# Altium PCB PCB1.PcbDoc
Units mil, origin at the board's own origin, x right, y up, seen from the top; angles counter-clockwise.
Board outline 2637.8 x 1850.39 mil, 2 copper layers (Top Layer, Bottom Layer); 74 components, 46 nets, 275 pads, 204 vias.
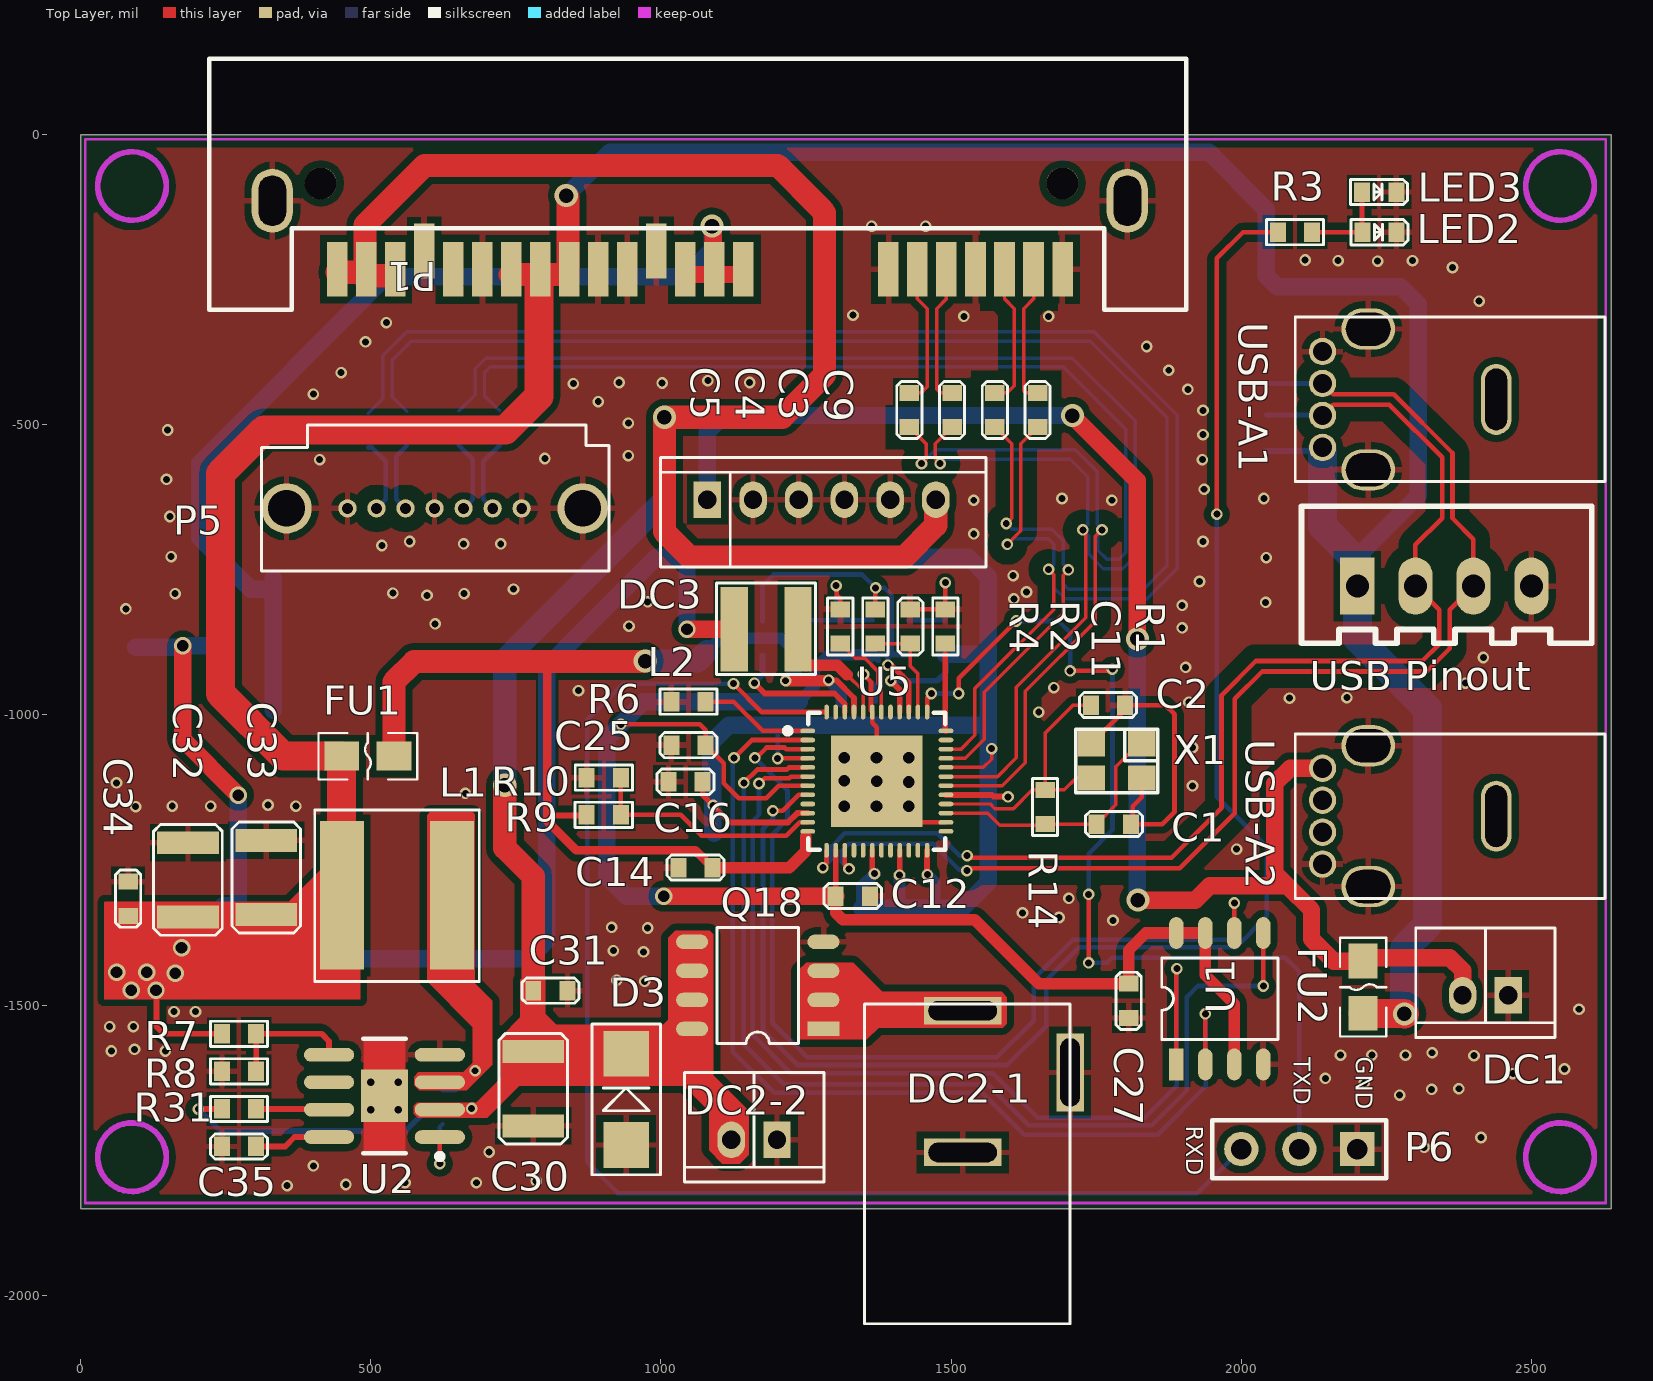
[diagram p0: Top Layer view]
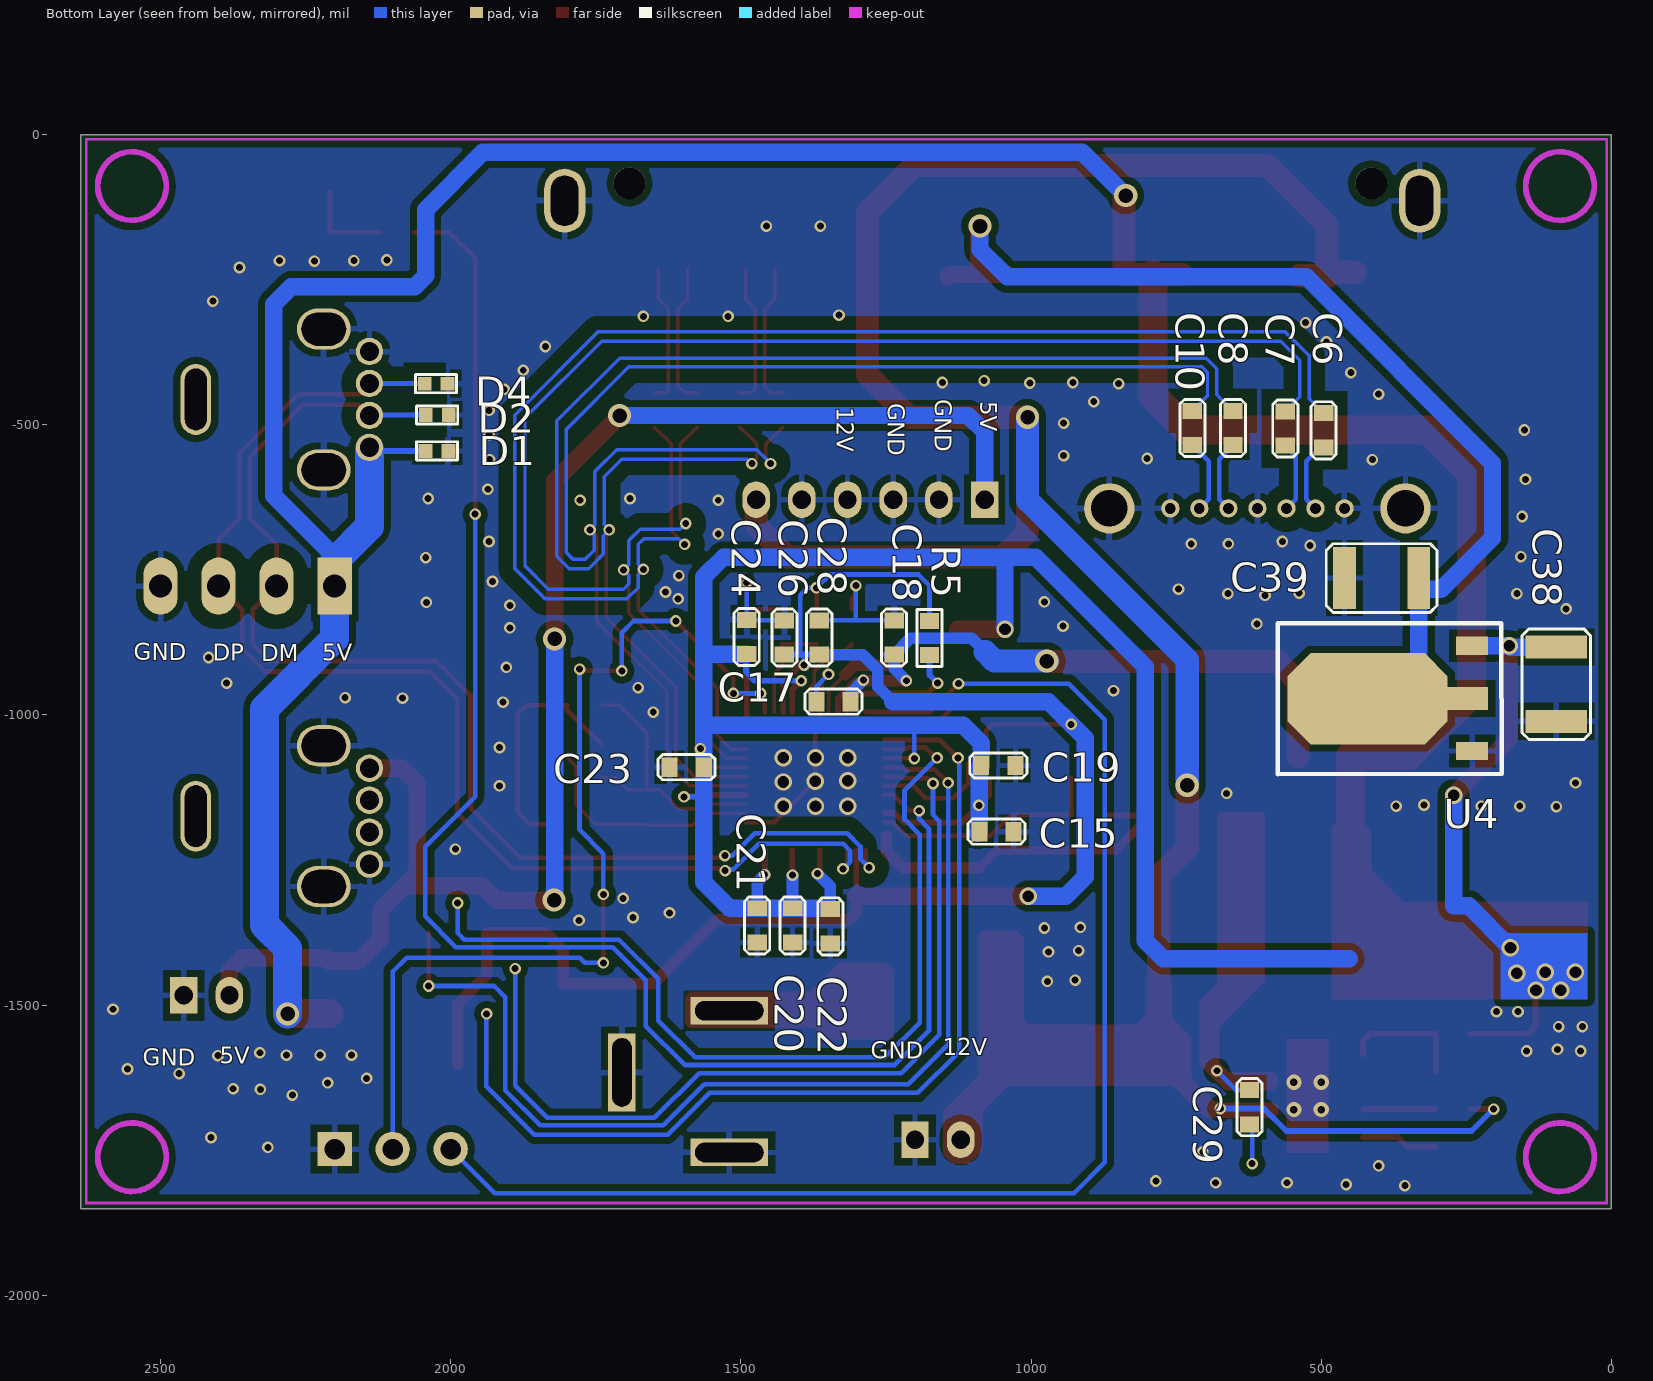
[diagram p1: Bottom Layer view, seen from below]

## Layer stack, top to bottom
Top Layer: signal copper 1.4
Dielectric: dielectric 12.6, FR-4, Dk 4.8
Bottom Layer: signal copper 1.4

## Board outline
0,-1850.39 2637.8,-1850.39 2637.8,0 0,0

## Design rules (kind name [scope] priority, off if disabled: settings)
Clearance hspeed [InNetClass('hspeed')] p1: gap=10
Clearance gnd [InPolygon] p2: gap=12
Clearance [All] p3: gap=5
DiffPairsRouting [All] p1: maxlimit=10 minlimit=10 mostfreqgap=10 maxuncoupledlength=500
MinimumSolderMaskSliver [All] p1: minsoldermaskwidth=1
PolygonConnect PolygonConnect_1 [IsVia] p1: connectstyle=Direct reliefconductorwidth=10 reliefentries=4 polygonreliefangle="90 Angle"
PolygonConnect [All] p2: connectstyle=Relief reliefconductorwidth=10 reliefentries=4 polygonreliefangle="90 Angle"
RoutingVias [All] p1: holewidth=28 width=50 viastyle="Through Hole" minholewidth=28 minwidth=50 maxholewidth=28 maxwidth=50
SilkToSilkClearance [All] p1: silktosilkclearance=1
SilkscreenOverComponentPads [All] p1: minsilkscreentomaskgap=1
SolderMaskExpansion [All] p1: expansion=4
Width [All] p1: maxlimit=300 minlimit=6 preferedwidth=10
24 further rules are at their usual default settings.

## Classes and differential pairs
component class CONNECTOR: C3 C4 C5 C6 C7 C8 C9 C10 D1 D2 D4 DC1 DC2-1 DC2-2 DC3 P1 P5 "USB Pinout" USB-A1 USB-A2
component class CPU: C1 C2 C11 C12 C14 C15 C16 C17 C18 C19 C20 C21 C22 C23 C24 C25 C26 C27 C28 L2 LED2 LED3 P6 R1 R2 R3 R4 R5 R6 R9 R10 R14 U1 U5 X1
component class power: C29 C30 C31 C32 C33 C34 C35 C38 C39 D3 FU1 FU2 L1 Q18 R7 R8 R31 U2 U4
net class hspeed: D_N D_P RX_N RX_P TX1_N TX1_P TX2_N TX2_P TX_N TX_P
differential pair RX: +RX_P -RX_N
differential pair TX: +TX_P -TX_N
differential pair D: +D_P -D_N
differential pair RX1: +RX1_P -RX1_N
differential pair RX2: +RX2_P -RX2_N
differential pair TX1: +TX1_P -TX1_N
differential pair TX2: +TX2_P -TX2_N

## Components (designator, comment, footprint, x,y, rotation, side; value= is the part's Value field where it differs from the comment)
C1 "20pF" 0603c 1810,-1188 r180 top
C2 "20pF" 0603C 1800,-983 r180 top
C3 "0.1uF/25V" 0603C 1575.33,-504 r90 top
C4 "0.1uF/25V" 0603C 1501.67,-504 r90 top
C5 "0.1uF/25V" 0603C 1428,-504 r90 top
C6 "0.1uF/25V" 0603C 496,-480 r270 bottom
C7 "0.1uF/25V" 0603C 562,-476.95 r270 bottom
C8 "0.1uF/25V" 0603C 652,-475.95 r270 bottom
C9 "0.1uF/25V" 0603C 1649,-504 r90 top
C10 "0.1uF/25V" 0603C 722,-475.95 r270 bottom
C11 "0.1uF/25V" 0603C 1429.67,-877 r90 top
C12 "0.1uF/25V" 0603C 1301,-1312 r0 top
C14 "0.1uF/25V" 0603C 1089,-1263 r180 top
C15 "10uF/25V" 0603C 1089,-1201 r180 bottom
C16 "0.1uF/25V" 0603C 1072,-1115 r180 top
C17 "10uF/25V" 0603C 1311,-977 r0 bottom
C18 "0.1uF/25V" 0603C 1236,-896 r90 bottom
C19 "0.1uF/25V" 0603C 1086,-1087 r180 bottom
C20 "0.1uF/25V" 0603C 1411,-1333 r270 bottom
C21 "0.1uF/25V" 0603C 1472,-1333 r270 bottom
C22 "0.1uF/25V" 0603C 1346,-1334.65 r270 bottom
C23 "0.1uF/25V" 0603C 1564,-1090 r0 bottom
C24 "0.1uF/25V" 0603C 1490,-895 r90 bottom
C25 "0.1uF/25V" 0603C 1077,-1052 r180 top
C26 "0.1uF/25V" 0603C 1425,-896 r90 bottom
C27 "0.1uF/25V" 0603C 1806,-1463 r270 top
C28 "0.1uF/25V" 0603C 1365,-896 r90 bottom
C29 "0.1uF/25V" 0603C 623.62,-1705.38 r90 bottom
C30 "100uF/25V" 1210C 780,-1580 r270 top
C31 "0.1uF/25V" 0603C 780,-1475 r0 top
C32 "100uF/25V" 1210C 185,-1348 r90 top
C33 "100uF/25V" 1210C 320,-1344 r90 top
C34 "0.1uF/25V" 0603C 82,-1346 r90 top
C35 "0.1uF/25V" 0603C 302.68,-1743.38 r180 top
C38 "22uF/25V" 1210C 95,-883 r270 bottom
C39 "22uF/25V" 1210C 332,-764 r0 bottom
D1 "PESD5V0S1UL" 0402R 2004,-545 r0 bottom
D2 "PESD5V0S1UL" 0402R 2003.56,-483.01 r0 bottom
D3 "SMAJ12CA" SMA 940,-1741 r90 top
D4 "PESD5V0S1UL" 0402R 2005.56,-429 r0 bottom
DC1 "DC1" 2X2MMZ 2460,-1483 r180 top
DC2-1 "DC2-1" DC005 1520,-2049 r90 top locked
DC2-2 "DC2-2" 2X2MMZ 1200,-1732 r180 top
DC3 "DC3" 2X6MMZ 1080,-629 r0 top
FU1 "SMD0805P100TF" F0805 450,-1071 r0 top
FU2 "SL0805300" F0805 2210,-1514 r90 top
L1 "XAL7030-103MEC" XAL7030 640,-1311 r180 top
L2 "NRS4012T4R7MDGJ" NRS4012T4R7MDGJ 1126,-852 r0 top
LED2 "" 0603LED 2208.55,-168.22 r0 top
LED3 "" 0603LED 2208,-99 r0 top
P1 "SATA7+15P" "SATA 7+15PML" 442,-232 r180 top locked
P5 "Header 9" "SATA 7P" 460,-644 r0 top
P6 "Header 3" HDR1X3 2200,-1748 r180 top
Q18 "DTM4435" SO-8 1280,-1541 r180 top
R1 "12K/1%" 0603R 1490,-877 r90 top
R2 "510K" 0603R 1369.33,-877 r90 top
R3 "330" 0603R 2063,-168 r0 top
R4 "100K" 0603R 1309,-877 r90 top
R5 "100K" 0603R 1175,-897 r90 bottom
R6 "100K" 0603R 1077,-977 r180 top
R7 "44.2K/1%" 0603R 243.62,-1549.38 r0 top
R8 "10K/1%" 0603R 302.68,-1614.04 r180 top
R9 "100K" 0603R 931,-1172 r180 top
R10 "150K" 0603R 872,-1108 r0 top
R14 "1MR" 0603R 1662,-1129 r270 top
R31 "100k" 0603R 302.68,-1678.71 r180 top
U1 "MX25L1006E" SO-8 1888,-1602 r90 top
U2 "FR9888SPG" SOP120P600-8N 523.62,-1656.38 r180 top
U4 "LD1117-3.3" sot223 240,-1062 r90 bottom
U5 "JMS578" QFN400P600-8N 1372,-1114 r0 top locked
"USB Pinout" "USB Pinout" sip-4l 2200,-778 r0 top
USB-A1 "Header 6" USB-A-C 2140,-539 r90 top
USB-A2 "Header 6" USB-A-C 2140,-1257 r90 top
X1 "30MHz/20P" XTAL4TN_3225 1785,-1079 r180 top

## Footprints (in the part's own frame and the unit in brackets; to place one, negate y for a bottom-side part, rotate by r counter-clockwise, add the part's x,y. Pads: shape width x height; smd on the part's side, far side on the other; paste and mask are expansions set on the pad)
2X2MMZ [mm]
  rect 1.2x1.6 hole 0.8: 1(0,0)
  oval 1.2x1.6 hole 0.8: 2(2,0)
  silkscreen extent -2.05,-2.95 4.05,1.85
2X6MMZ [mm]
  rect 1.2x1.6 hole 0.8: 1(0,0)
  oval 1.2x1.6 hole 0.8: 2(2,0) 3(4,0) 4(6,0) 5(8,0) 6(10,0)
  silkscreen extent -2.05,-2.95 12.19,1.85
0402R [mm]
  rect 0.6x0.6 smd: 1(0,0) 2(1,0)
  silkscreen extent -0.4,-0.4 1.4,0.4
0603c [mm]
  rect 0.7x0.85 smd: 1(0,0) 2(1.5,0)
  silkscreen extent -0.5,-0.55 2,0.55
0603C [mm]
  rect 0.7x0.85 smd: 1(0,0) 2(1.5,0)
  silkscreen extent -0.5,-0.55 2,0.55
0603LED [mm]
  rect 0.7x0.85 smd: 1(0,0) 2(1.5,0)
  silkscreen extent -0.5,-0.55 2,0.55
0603R [mm]
  rect 0.7x0.85 smd: 1(0,0) 2(1.5,0)
  silkscreen extent -0.5,-0.55 2,0.55
1210C [mm]
  rect 1x2.7 smd: 1(0,0) 2(3.25,0)
  silkscreen extent -0.8,-1.5 4.05,1.5
DC005 [mm]
  rect 3.4x1.2 hole 0.85 slot 3 at 0 deg: 2(11,-4.7)
  rect 1.2x3.4 hole 0.85 slot 3 at 90 deg: 3(7.5,0) 4(13.7,0)
  silkscreen extent 0,-4.7 14,4.3
F0805 [mil]
  rect 60x50 smd: 1(0,0) 2(90,0)
  silkscreen extent -40,-40 130,40, body extent 4,-23 82,24, height 20
HDR1X3 [mm] "Connector; Header; 3 Position"
  rect 1.5x1.5 hole 0.9: 1(0,0)
  round 1.5 hole 0.9: 2(2.54,0) 3(5.08,0)
  silkscreen extent -1.27,-1.27 6.35,1.27
NRS4012T4R7MDGJ [mm]
  rect 1.2x3.7 smd: 1(0,0) 2(2.8,0)
  silkscreen extent -0.76,-1.98 3.56,2.02
QFN400P600-8N [mm]
  oval 0.65x0.2 smd: 1(-3.025,2.2) 2(-3.025,1.8) 3(-3.025,1.4) 4(-3.025,1) 5(-3.025,0.6) 6(-3.025,0.2) 7(-3.025,-0.2) 8(-3.025,-0.6) 9(-3.025,-1) 10(-3.025,-1.4) 11(-3.025,-1.8) 12(-3.025,-2.2) 25(3.025,-2.2) 26(3.025,-1.8) 27(3.025,-1.4) 28(3.025,-1) 29(3.025,-0.6) 30(3.025,-0.2) 31(3.025,0.2) 32(3.025,0.6) 33(3.025,1) 34(3.025,1.4) 35(3.025,1.8) 36(3.025,2.2)
  oval 0.2x0.65 smd: 13(-2.2,-3.025) 14(-1.8,-3.025) 15(-1.4,-3.025) 16(-1,-3.025) 17(-0.6,-3.025) 18(-0.2,-3.025) 19(0.2,-3.025) 20(0.6,-3.025) 21(1,-3.025) 22(1.4,-3.025) 23(1.8,-3.025) 24(2.2,-3.025) 37(2.2,3.025) 38(1.8,3.025) 39(1.4,3.025) 40(1,3.025) 41(0.6,3.025) 42(0.2,3.025) 43(-0.2,3.025) 44(-0.6,3.025) 45(-1,3.025) 46(-1.4,3.025) 47(-1.8,3.025) 48(-2.2,3.025)
  rect 0x0 smd: 49(-0.85,0) 50(-0.35,0) 51(0,0.85) 52(0,0.35) 53(0.85,0) 54(0.35,0) 55(0,-0.85) 56(0,-0.35)
  rect 4x4 smd: 49(0,0)
  silkscreen extent -4.02,-3 3,3
"SATA 7+15PML" [mm]
  rect 0.9x2.4 smd: 1(-31.75,0) 2(-30.48,0) 3(-29.21,0) 4(-27.94,0) 5(-26.67,0) 6(-25.4,0) 7(-24.13,0) 8(-17.78,0) 9(-16.51,0) 10(-15.24,0) 11(-13.97,-0.8) 12(-12.7,0) 13(-11.43,0) 14(-10.16,0) 15(-8.89,0) 16(-7.62,0) 17(-6.35,0) 18(-5.08,0) 19(-3.81,-0.8) 20(-2.54,0) 21(-1.27,0) 22(0,0)
  round 1.4 hole 1.4 unplated: 23(-31.75,-3.76) 24(0.72,-3.76)
  oval 1.8x2.8 hole 1.2 slot 2.2 at 90 deg: 25(-34.585,-3) 26(2.835,-3)
  silkscreen extent -37.16,-9.22 5.59,1.78
"SATA 7P" [mm]
  round 0.8 hole 0.47: 1(0,0) 2(1.27,0) 3(2.54,0) 4(3.81,0) 5(5.08,0) 6(6.35,0) 7(7.62,0)
  round 2.2 hole 1.6: 8(10.29,0) 9(-2.67,0)
  silkscreen extent -3.76,-2.74 11.44,3.66
sip-4l [mm]
  rect 1.5x2.5 hole 1: 1(0,0)
  oval 1.5x2.5 hole 1: 2(2.54,0) 3(5.08,0) 4(7.62,0)
  silkscreen extent -2.44,-2.5 10.26,3.5
SMA [mm]
  rect 2x2 smd: 1(0,0) 2(4,0)
  silkscreen extent -1.3,-1.5 5.3,1.5
SO-8 [mil]
  rect 55x25 smd: 1(0,0)
  oval 55x25 smd: 2(0,-50) 3(0,-100) 4(0,-150) 5(226.38,-150) 6(226.38,-100) 7(226.38,-50) 8(226.38,0)
  silkscreen extent 43,-175 183,25
SOP120P600-8N [mm]
  oval 2.2x0.6 smd: 1(-2.425,1.8) 2(-2.425,0.6) 3(-2.425,-0.6) 4(-2.425,-1.8) 5(2.425,-1.8) 6(2.425,-0.6) 7(2.425,0.6) 8(2.425,1.8)
  rect 2.05x2.3 smd: 9(0,0)
  silkscreen extent -2.55,-2.5 0.93,2.77
sot223 [mm]
  rect 0.8x1.4 smd: 1(0,0) 3(4.6,0)
  rect 1x1.854 smd: 2(2.3,0.227)
  oct 4x7 smd: 4(2.286,4.572)
  silkscreen extent -1.02,-1.3 5.59,8.51
USB-A-C [mm]
  round 1.2 hole 0.85: 1(4.2,0) 2(2.8,0) 3(1.4,0) 4(0,0)
  oval 1.8x2.35 hole 1.45 slot 1.95 at 90 deg: 5(-0.98,-2) 6(5.18,-2)
  oval 3.1x1.35 hole 0.95 slot 2.7 at 0 deg: 7(2.1,-7.6)
  silkscreen extent -1.5,-12.36 5.7,1.19
XAL7030 [mm]
  rect 1.92x6.5 smd: 1(0,0) 2(4.82,0)
  silkscreen extent -1.19,-3.74 6.01,3.76
XTAL4TN_3225 [mm]
  rect 1.2x1.1 smd: 1(-1.1,-0.75) 2(1.1,-0.75) 3(1.1,0.75) 4(-1.1,0.75)
  silkscreen extent -1.8,-1.38 1.79,1.4

## Part data
C1 C2: library part CAP, "Capacitor"
C3 C4 C5 C6 C7 C8 C9 C10 C11 C12 C14 C15 C16 C17 C18 C19 C20 C21 C22 C23 C24 C25 C26 C27 C28 C29 C30 C31 C32 C33 C34 C35 C38 C39: library part 0.01UF, "CCX85-103"
D1 D2 D4: library part "D Zener", "Zener Diode"
D3: library part "DIODE S", "Schottky Diode"
DC1 DC2-2: library part "Header 2", "Header, 2-Pin"
DC2-1 "USB Pinout": library part "Header 4", "Header, 4-Pin"
DC3: library part "Header 6", "Header, 6-Pin"
FU1 FU2: library part FUSE2, "Fuse"
L1 L2: library part INDUCTOR
LED2 LED3: library part LED
P1: "Conn SATA PL 15Power/7Signal POS 1.27mm Solder RA Thru-Hole 22 Terminal 1 Port"
P5: "Header, 9-Pin"
P6: "Header, 3-Pin"
Q18: library part Si4004DY, "Si4004DY"
R1 R2 R4 R5 R6 R7 R8 R14 R31: library part Res3, "Resistor"
R3 R9 R10: library part R, "R"
U1: library part M25P40-VMN6
U4: library part LD1117-1.2
USB-A1 USB-A2: "Header, 6-Pin"
X1: library part CRYSTAL_2

## Via types
v1: diameter 20, hole 12, Top Layer to Bottom Layer, tented both sides, 172 vias
v2: diameter 30, hole 20, Top Layer to Bottom Layer, tented both sides, 19 vias
v3: diameter 40, hole 25, Top Layer to Bottom Layer, tented both sides, 9 vias
v4: diameter 25.98, hole 12.99, Top Layer to Bottom Layer, tented top, 4 vias

## Nets (pads, with @x,y where several pads share a name; then routed paths per layer and width w, separated by ;. In a path a pad name is that pad's centre, name@x,y a point inside that pad or via, vN(x,y) a via of type N, cw(c..) or ccw(c..) an arc to the next point about the centre after c; other vN are vias at no path point)
CS: U1.1 U5.6 | length 1710.8
  Top Layer w8: v1@1169.5,-1118.5 1179,-1109 1221,-1109 1223.87,-1106.13 U5.6 ; U1.1 v1@1888,-1438
  Bottom Layer w8: v1(1169,-1118) 1169,-1172 1158,-1183 1158,-1551 1224,-1617 1572,-1617 1649,-1694 1834,-1694 1889,-1639 v1(1889,-1437) v1@1885,-1433
D_N: "USB Pinout.2" D2.2 U5.13 USB-A1.3 | length 2121.2
  Top Layer w8: v1(1279,-1263) 1285.39,-1256.61 U5.13 ; v1(1527.73,-1242.27) 1531.73,-1246.27 1879.73,-1246.27 1966,-1160 1966,-966 2025,-907 2312,-907 2341,-878 2341,-819 2300,-778 2300,-707 2346,-661 2346,-556 2257,-467 ; USB-A1.3 2158.56,-465.32 2255.32,-465.32 2256.16,-466.16
  Bottom Layer w8: v1(1279,-1263) 1294,-1248 1294,-1226.54 1316.54,-1204 1476.46,-1204 1514.73,-1242.27 v1(1527.73,-1242.27) v1@1528,-1242 ; D2.2 2139.13,-483.01 USB-A1.3
D_P: "USB Pinout.3" D4.2 U5.15 USB-A1.2 | length 2219.4
  Top Layer w8: U5.15 1316.88,-1257.88 v1(1324,-1265) ; v1(1527,-1268.27) 1531,-1264.27 1893.73,-1264.27 1989,-1169 1989,-972 2036,-925 2319.46,-925 2359,-885.46 2359,-819 2400,-778 ; USB-A1.2 2158.56,-447.32 2241,-447.32 ; 2256.16,-447.32 2241,-447.32 ; 2400,-727 2400,-778 ; 2241,-447.32 2262.78,-447.32 2364,-548.54 2364,-661 2400,-697 2400,-778
  Bottom Layer w8: v1(1324,-1265) 1323,-1265 1312,-1254 1312,-1234 1324,-1222 1469,-1222 1513.27,-1266.27 v1@1527,-1266.27 ; D4.2 2045.16,-428.76 USB-A1.2
GND: "USB Pinout.4" C1.1 C2.1 C11.2 C12.2 C14.2 C15.2 C16.2 C17.2 C18.2 C19.2 C20.2 C21.2 C22.2 C23.2 C24.2 C25.2 C26.2 C27.2 C28.2 C30.2 C31.2 C32.2 C33.2 C34.2 C35.2 C38.2 C39.2 D1.1 D2.1 D3.1 D4.1 DC1.1 DC2-1.2 DC2-1.3 DC2-2.1 DC3.2 DC3.3 DC3.4 DC3.5 LED2.2 LED3.2 P1.1 P1.4 P1.7 P1.11 P1.12 P1.13 P1.17 P1.19 P1.25 P1.26 P5.1 P5.4 P5.7 P5.8 P5.9 P6.1 Q18.4 R1.2 R4.2 R6.2 R8.2 R10.1 U1.4 U2.4 U2.9 U4.1 U5.26 U5.43 U5.49 USB-A1.1 USB-A1.5 USB-A1.6 USB-A2.4 USB-A2.5 USB-A2.6 X1.2 X1.4 | length 1387.1
  Top Layer w8: v1(1302,-777) 1303,-778 1303,-794 1309,-800 R4.2 ; v1(1349,-930) 1362,-943 1362,-992.78 U5.43 1364.13,-1013.13 1372,-1021 v2(1372,-1114) 1442.87,-1184.87 U5.26 ; C11.2 R1.2 v1(1490,-772) ; X1.2 1800,-991.17 C2.1 1869,-983 1885,-999 1885,-1167 1864,-1188 C1.1 1813,-1185 1813,-1157 1828.31,-1141.69 X1.4
  Bottom Layer w8: C18.2 1302,-836.94 ; v1(1302,-777) 1302,-836.94 ; v1(1349,-930) 1370.06,-951.06 C17.2 ; C28.2 1302,-836.94 ; C26.2 1489,-836.94 C24.2 v1(1490,-772)
  other v1: 356,-1811 457,-1809 559,-1806 682,-1806 785,-1803 401,-1777 704,-1753 2315,-1745 2413,-1728 2273,-1655 2328,-1645 2375,-1644 2212,-1634 2145,-1626 2468,-1618 2557,-1610 2401,-1587 2171,-1586 2225,-1586 2283,-1586 2329,-1582 53,-1579 146,-1579 93,-1576 50,-1537 91,-1537 161,-1511 198,-1511 2582,-1507 972,-1459 924,-1457 970,-1408 918,-1406 977,-1367 915,-1366 1779,-1354 1686,-1349 1623,-1341 1703,-1316 1992,-1231 95,-1158 158,-1157 224,-1157 371,-1157 323,-1155 663,-1135 1916,-1122 62,-1117 1916,-1056 1651,-995 1910,-978 2083,-971 2182,-970 858,-958 1677,-953 2386,-945 1904,-918 2417,-901 1898,-850 945,-847 611,-843 78,-817 1898,-811 2042,-806 977,-805 1608,-800 597,-794 163,-791 661,-791 538,-790 1630,-788 746,-783 1928,-770 1607,-760 2043,-729 156,-727 519,-708 660,-705 724,-705 567,-701 1934,-701 1539,-688 154,-658 1539,-630 1777,-630 1691,-627 2039,-627 1936,-611 148,-594 412,-560 1933,-560 800,-558 944,-553 1934,-517 150,-509 944,-497 1934,-475 892,-460 401,-447 1908,-439 849,-429 1002,-428 928,-427 1153,-427 1081,-424 449,-410 1875,-406 1837,-365 491,-357 527,-324 1522,-313 1668,-313 1331,-311 2410,-287 2364,-229 2235,-218 2167,-217 2295,-217 2110,-216 1363,-157.61 1456,-157.61
  other v2: 1316,-1157 1371.5,-1157 1427,-1157 1427,-1115.5 1316,-1113 1316,-1074 1371.5,-1074 1427,-1074
  other v4: 500,-1680 547.24,-1680 500,-1632.76 547.24,-1632.76
GPIO4: R3.1 U5.8 | length 2799.5
  Top Layer w8: v1(1193,-1165) 1210,-1165 1237.38,-1137.62 U5.8 ; v1(1958,-654) 1958,-213 2003,-168 R3.1
  Bottom Layer w8: v1@1196,-1168 v1(1193,-1165) 1193,-1179 1176,-1196 1176,-1544 1235,-1603 1597,-1603 1664,-1536 1664,-1457 1721,-1400 1991,-1400 2044,-1347 2044,-1227 1958,-1141 v1(1958,-654)
GPIO5: U5.9
MISO: U1.2 U5.2 | length 1767.7
  Top Layer w8: v1(1126,-1074) 1157,-1043 1252.77,-1043 U5.2 ; U1.2 v1(1938,-1515)
  Bottom Layer w8: v1(1126,-1074) 1124,-1076 1124,-1580 1195,-1651 1554,-1651 1626,-1723 1856,-1723 1939,-1640 1939,-1516 v1(1938,-1515)
MOSI: U1.5 U5.5 | length 1809
  Top Layer w8: v1(1143,-1117) 1166,-1094 1217,-1094 1220.62,-1090.38 U5.5 ; v1(2038,-1467) U1.5
  Bottom Layer w8: v1(1143,-1117) 1143,-1567 1212,-1636 1563,-1636 1634,-1707 1846,-1707 1906,-1647 1906,-1486 1925,-1467 v1(2038,-1467)
NetC1_2: C1.2 R14.2 U5.27 X1.1 | length 443
  Top Layer w6: U5.27 1563.12,-1169.12 1584,-1190 1660.06,-1190 R14.2 1750.89,-1188.06 C1.2 ; C1.2@1750.69,-1187.75 C1.2 ; X1.1 1823.7,-1049.47 1784,-1089.17 1784,-1154.94 C1.2
NetC2_2: C2.2 R14.1 U5.28 X1.3 | length 472.7
  Top Layer w6: U5.28 1567.37,-1153.37 1575.5,-1161.5 1607.5,-1161.5 1640,-1129 1659,-1129 R14.1 ; C2.2 1710,-983 1662,-1031 R14.1 ; X1.3 1715.47,-1108.53 1695,-1129 R14.1
NetC11_1: C11.1 R2.1 U5.38 | length 193.6
  Top Layer w6: R2.1 C11.1 1429.67,-915.67 1442.87,-928.87 1442.87,-967 ; U5.38 1442.87,-967 ; 1442.87,-976.91 1442.87,-967
NetC29_1: C29.1 U2.1 | length 115.1
  Top Layer w8: v1(619.09,-1772.91) U2.1
  Bottom Layer w8: v1(619.09,-1772.91) 619.09,-1709.91 C29.1
NetC29_2: C29.2 L1.1 U2.3 | length 70.2
  Bottom Layer w8: C29.2 646.68,-1646.32 v1(680,-1613)
NetC35_1: C35.1 U2.8 | length 132.2
  Top Layer w10: C35.1 352.62,-1743.38 368.76,-1727.24 U2.8
NetL2_2: L2.2 U5.44 | length 175.5
  Top Layer w6: 1320.64,-930.36 1348.38,-958.09 U5.44
  Top Layer w20: L2.2@1228,-914 1304.28,-914 1320.64,-930.36
NetLED2_1: LED2.1 LED3.1 R3.2 | length 155.7
  Top Layer w8: R3.2 LED2.1@2208.33,-168 ; LED3.1 2208,-167.67 LED2.1@2208.33,-168 ; LED2.1 LED2.1@2208.33,-168
NetR1_1: R1.1 U5.36 | length 132.8
  Top Layer w10: 1490,-895 1490,-1026.29 U5.36
NetR4_1: R4.1 U5.42 | length 161.8
  Top Layer w6: R4.1@1309,-881.46 R4.1 1334.55,-902.55 1351.55,-902.55 1374,-925 1374,-946.46 1380,-952.46 1380,-976.78 1379.87,-976.91 U5.42
NetR5_1: R5.1 U5.46 | length 238.6
  Top Layer w10: v1(1161,-945) 1179,-963 1299,-963 1316.88,-980.88 U5.46
  Bottom Layer w10: v1(1161,-945) 1175,-931 R5.1
NetR6_1: R6.1 U5.1 | length 196.8
  Top Layer w8: R6.1 1125,-977 1175.39,-1027.39 U5.1
NetR7_2: R7.2 R8.1 U2.5 | length 218.8
  Top Layer w10: R8.1 R7.2 415.38,-1549.38 428.15,-1562.15 U2.5
NetR9_1: R9.1 R10.2 U5.11 | length 410.5
  Top Layer w8: R10.2 931,-1108.06 R9.1 1034,-1172 1070,-1208 1215.8,-1208 1238.93,-1184.87 U5.11
  Top Layer w10: R9.1 R9.1@931.06,-1171.94
NetR31_1: R31.1 U2.7 | length 126
  Top Layer w10: R31.1 426.86,-1678.71 U2.7
RX1_N: C4.2 P1.5 | length 242.9
  Top Layer w6: P1.5 1492,-283 1475,-300 1475,-438.46 1481.49,-444.94 C4.2
RX1_P: C5.2 P1.6 | length 247.9
  Top Layer w6: C5.2@1431.06,-444.94 C5.2 1448.49,-444.94 1459,-434.43 1459,-300 1442,-283 P1.6
RX2_N: C8.2 P5.5 | length 125.6
  Bottom Layer w8: C8.2 676,-559 676,-628 P5.5
RX2_P: C10.2 P5.6 | length 127.3
  Bottom Layer w8: P5.6 694,-628 694,-562.81 694.19,-562.81 C10.2
RX_N: C4.1 C8.1 U5.31 | length 2679.3
  Top Layer w6: v1(1481,-567) 1472.83,-558.83 1472.83,-532.64 1481.29,-524.18 1481.49,-524.18 C4.1 ; U5.31 1530.87,-1106.13 ; 1531,-1106 1530.87,-1106.13 ; v1(1727,-681) 1732,-686 1732,-832.37 1612,-952.37 1612,-1074 1579.87,-1106.13 1530.87,-1106.13
  Bottom Layer w6: C8.1 680,-447.95 680,-403.37 698.37,-385 1709,-385 1817,-493 1817,-726.63 1795.63,-748 1762.37,-748 1737,-722.63 1737,-691 v1(1727,-681) 1735.5,-672.5 1735.5,-589.5 1705,-559 1517,-559 1489,-559 v1(1481,-567) v1@1485,-567
RX_P: C5.1 C10.1 U5.30 | length 2648.6
  Top Layer w6: C5.1 1456.83,-532.83 1456.83,-559.17 ; U5.30 1588.13,-1121.87 1628,-1082 1628,-959 1748,-839 1748,-693 v1(1760,-681)
  Bottom Layer w6: C10.1 696,-449.95 696,-410 706,-400 1693,-400 1801,-508 1801,-720 1789,-732 1769,-732 1753,-716 1753,-688 v1(1760,-681) 1751.5,-672.5 1751.5,-580.5 1714,-543 1472.47,-543 1449,-566.47 v1(1449,-567)
RXD: P6.3 U5.48 | length 2401.8
  Top Layer w8: v1(1125,-946) 1173.91,-994.91 U5.48
  Bottom Layer w8: v1(1125,-946) 935,-946 873,-1008 873,-1771 926,-1824 1924,-1824 P6.3
SCK: U1.6 U5.3 | length 1645.4
  Top Layer w8: v1@1162,-1076 1182,-1056 1213,-1056 1215.88,-1058.88 U5.3 ; U1.6 v1(1988,-1324)
  Bottom Layer w8: v1(1162,-1074) 1218,-1130 1218,-1180 1192,-1206 1192,-1530 1252,-1590 1579,-1590 1642.5,-1526.5 1642.5,-1454.5 1710,-1387 1976.62,-1387 1988,-1375.62 v1(1988,-1324)
TX1_N: C3.2 P1.3 | length 246.7
  Top Layer w6: C3.2 1597.06,-444.94 1609,-433 1609,-300 1592,-283 P1.3
TX1_P: C9.2 P1.2 | length 250
  Top Layer w6: C9.2@1640.94,-444.94 C9.2 1628.49,-444.94 1625,-441.46 1625,-300 1642,-283 P1.2
TX2_N: C7.2 P5.3 | length 122.1
  Bottom Layer w8: P5.3 544,-628 544,-554 C7.2
TX2_P: C6.2 P5.2 | length 127.5
  Bottom Layer w8: C6.2 502.06,-539.06 526,-563 526,-628 P5.2
TX_N: C3.1 C7.1 U5.33 | length 2761.3
  Top Layer w6: U5.33 1524.37,-1074.63 1557,-1042 1557,-961 1693,-825 1693,-759 v1(1702,-750) ; C3.1 1604.17,-532.83 1604.17,-565.83 1604.17,-661 v1@1595.17,-670
  Bottom Layer w6: C7.1 537,-451.95 537,-389 570,-356 1740,-356 1872,-488 1872,-743 1832,-783 1702,-783 1693,-774 1693,-759 v1(1702,-750) 1693,-741 1693,-699.37 1673.63,-680 1605,-680 v1(1595,-670)
TX_P: C6.1 C9.1 U5.34 | length 2861.4
  Top Layer w6: U5.34 1506,-1058.88 ; 1506,-1058.63 1517.37,-1058.63 1541,-1035 1541,-954.37 1677,-818.37 1677,-758 v1(1668,-749) ; v1(1597,-706) 1620.17,-682.83 1620.17,-565.83 1620.17,-532.83 C9.1
  Bottom Layer w6: C6.1 521,-455 521,-381 562,-340 1746.63,-340 1890,-483.37 1890,-747.63 1837.63,-800 1696.37,-800 1677,-780.63 1677,-758 v1(1668,-749) 1677,-740 1677,-706 1667,-696 1607,-696 v1(1597,-706)
TXD: P6.2 U5.37 | length 1695.2
  Top Layer w8: U5.37 1458.61,-970.39 v1(1466,-963) ; v1(1513,-963) 1513,-937 v1(1612,-838) ; v1(1705,-924) 1775,-924 v1(1778,-921) ; v1(1737,-1427) v1(1737,-1309)
  Bottom Layer w8: v1(1466,-963) v1(1513,-963) ; v1(1612,-838) 1685,-838 1705,-858 v1(1705,-924) ; v1(1737,-1427) 1769,-1427 1778,-1418 2076,-1418 2100,-1442 P6.2 ; v1(1737,-1309) 1737,-1239 1778,-1198 v1(1778,-921)
VBUS: C14.1 C17.1 C18.1 FU1.2 R9.2 U5.12 U5.45 | length 1980.5
  Top Layer w10: 804,-1173 870.94,-1173 R9.2 ; v1(1289,-940) 1302,-940 1332.63,-970.63 U5.45
  Top Layer w15: 804,-917 804,-1173 804,-1183 854,-1233 1009.76,-1233 ; 1009.99,-1233.23 1059.23,-1233.23 C14.1
  Top Layer w20: C14.1 1221,-1263 1249.49,-1234.51 1249.49,-1209 ; v1(1215,-941) 1288,-941 v1(1289,-940)
  Top Layer w40: FU1.2 540,-943 575,-908 971,-908 v3@972,-907
  Bottom Layer w20: 1079,-891 1102,-868 1208,-868 C18.1 ; v1(1215,-941) 1236,-920 C18.1 ; C18.1@1245,-896 C18.1 ; v1(1289,-940) 1311,-962 C17.1
  Bottom Layer w40: v3@972,-907 v3(973,-907) 1063,-907 1079,-891
VCC: C30.1 C31.1 D3.2 DC2-2.2 DC3.6 P1.20 P1.21 P1.22 Q18.5 Q18.6 Q18.7 Q18.8 R31.2 U2.2 | length 4056.9
  Top Layer w10: v1(203,-1679) 203.29,-1678.71 R31.2
  Top Layer w40: P1.22@442,-237 P1.21@492,-237 ; P1.21@487,-243 P1.20@537,-243 ; P1.21@490,-243 490,-241 490,-156 593,-53 1201,-53 1277,-129 ; v3(731,-1121) 731,-1229 780,-1278 C31.1 ; 1276.5,-129.5 1282,-135 1282,-414 1209,-487 v3(1006,-487) 1006,-684 1050,-728 1419,-728 1473.7,-673.3 DC3.6
  Bottom Layer w10: v1(203,-1679) 241,-1717 560,-1717 599,-1678 v1(674,-1678)
  Bottom Layer w40: v3(731,-1121) 731,-905 1006,-630 v3(1006,-487)
VCC_1.2V: C15.1 C16.1 C19.1 C20.1 C21.1 C22.1 C23.1 C24.1 L2.1 U5.4 U5.10 U5.18 U5.21 U5.24 U5.29 U5.32 U5.40 | length 4456.6
  Top Layer w6: U5.32 1555.62,-1090.38 1570,-1076 v1(1570,-1058)
  Top Layer w8: v1@1201.37,-1074.63 U5.4
  Top Layer w10: C16.1 1072,-1138 v1(1089.83,-1155.83) 1119,-1185 1219,-1185 1234.88,-1169.12 U5.10 ; v1@1364.13,-1269.13 U5.18 ; v1(1396,-941) 1411.37,-956.37 U5.40 ; v1@1411.37,-1273.37 U5.21 ; v1@1458.61,-1272.39 U5.24 ; U5.29 1570,-1137.62 ; 1572.75,-1140.37 v1@1597.37,-1140.37
  Top Layer w30: v2(1045,-852) L2.1
  Bottom Layer w8: 1200,-1018 1201,-1019 v1(1201,-1075)
  Bottom Layer w10: v1(1396,-941) 1476,-941 1491,-926 1491,-896 C24.1 ; 1565,-1141 v1(1598,-1141)
  Bottom Layer w20: C22.1 1346,-1333 1346,-1295.37 v1(1368,-1273.37) ; C20.1 v1(1411,-1276) ; v1(1459,-1275) 1472,-1288 C21.1
  Bottom Layer w30: 452,-1420 718,-1420 772,-1420 803,-1389 803,-917 992,-728 1530,-728 1564,-762 1564,-918 1564,-1020 ; v2(1045,-852) 1045,-729 ; C15.1@1092,-1204 C15.1 1089,-1090 C19.1 1086,-1049 1117,-1018 1200,-1018 1562,-1018 1564,-1020 ; C22.1@1346,-1333 C20.1 C21.1 1519,-1333 1564,-1288 C23.1 1564,-1020 ; C24.1 1564,-895
VCC_3.3V: C39.1 P1.8 P1.9 P1.10 U4.2 U4.4 | length 1817.4
  Top Layer w30: P1.10@1040,-241 P1.9@1090,-241 ; v3(1088,-157.61) 1090,-159.61 P1.9@1090,-241 ; P1.9@1090,-213 P1.9@1090,-241 ; P1.8@1143,-245 1139,-241 P1.9@1090,-241
  Bottom Layer w30: U4.4@332,-992 C39.1@332,-783 ; C39.1 C39.1@332,-783 ; v3@1091,-160.61 v3(1088,-157.61) 1088,-198 1041,-245 526,-245 205,-566 205,-695 293,-783 C39.1@332,-783
VCC_5V: "USB Pinout.1" C32.1 C33.1 C34.1 C38.1 D1.2 FU1.1 FU2.1 L1.2 P1.14 P1.15 P1.16 R7.1 U4.3 USB-A1.4 | length 6363.9
  Top Layer w10: v2@131,-1474 131,-1537 143.38,-1549.38 R7.1
  Top Layer w30: v2(176.1,-880.9) 176.1,-1042.1 v2(272,-1138) ; P1.15@790,-242 P1.15@790,-238 ; v3@836,-101 v3@838.5,-103.5 ; v3(837,-105) v3@838.5,-103.5 ; v3@839,-103 v3@838.5,-103.5 ; P1.14@840,-241 840,-147 ; v3@840,-105 v3@838.5,-103.5
  Top Layer w40: P1.16@740,-241 790,-241 P1.14@836,-241 ; v3(837,-105) 840,-108 P1.14@840,-241
  Top Layer w50: L1.2 450,-1310.76 FU1.1 349,-1071 241,-963 241,-584 316,-509 732,-509 790,-451 P1.15@790,-241 ; FU2.1 2280,-1514 v3(2281,-1515)
  Bottom Layer w10: D1.2 2134,-545 USB-A1.4
  Bottom Layer w30: C38.1 174,-883 v2(176.1,-880.9) U4.3 ; v2(174,-1401) 246.1,-1328.9 272,-1328.9 v2(272,-1138) ; v3(837,-105) 911.5,-30.5 1944.5,-30.5 2043.37,-129.37 2043.37,-243.37 2062,-262 2275,-262 2305,-292 2305,-622 2200,-727 2200,-735 2200,-778
  Bottom Layer w50: USB-A1.4@2140,-542.5 2140,-675 2200,-735 ; 2200,-778 2200,-868 2321,-989 2321,-1362 2281,-1402 v3(2281,-1515)
  other v2: 87,-1474 130,-1474 163,-1445 62,-1443 114,-1443
VCC_IN: DC2-1.4 Q18.1 Q18.2 Q18.3
VCCO: C12.1 C25.1 C26.1 C27.1 C28.1 R2.2 R5.2 U1.3 U1.7 U1.8 U5.7 U5.14 U5.39 | length 3372
  Top Layer w8: v1(931,-1016) 1067,-1016 1077,-1026 C25.1 1108,-1083 1108,-1117.5 1134,-1143.5 1181.37,-1143.5 1202.87,-1122 1252.78,-1122 U5.7 ; R2.2 1369.33,-781.67 v1(1370,-781)
  Top Layer w10: C12.1 1301.13,-1311.87 U5.14 ; v1(1391,-914) 1397.28,-914 1416,-932.72 ; 1416,-933 1427.12,-944.12 U5.39
  Top Layer w20: C12.1 1301,-1341 1313,-1353 1541,-1353 1651,-1463 C27.1 1806,-1405 1835.38,-1375.62 U1.8 U1.7 1938,-1448 1988,-1498 U1.3
  Top Layer w30: v2(1005,-1312) C12.1
  Bottom Layer w8: R5.2 1175,-777 1194,-758 1347,-758 v1(1370,-781) 1385,-781 1398,-794 1398,-892 1394,-896 1391,-899
  Bottom Layer w10: C28.1@1365,-904 C28.1 ; C28.1@1374,-905 C28.1 ; v1(1391,-914) 1391,-899 ; C26.1 1394,-896 C28.1
  Bottom Layer w20: 1238,-977 1264,-951 1264,-922 1290,-896 C28.1 C28.1@1353,-896
  Bottom Layer w30: v2(1005,-1312) 940,-1312 907,-1279 907,-1040 v1(931,-1016) 970,-977 1238,-977
VOUT_5V: DC1.2 DC3.1 FU2.2 USB-A2.1 | length 2622.8
  Top Layer w30: v3(1709,-484) 1821,-596 v3(1821,-869) ; v3(1822,-1319) 1921,-1319 1946,-1294 2079,-1294 ; USB-A2.1 2084.35,-1091.65 2058,-1118 2058,-1273 2079,-1294 ; DC1.2 2381.26,-1440.26 2359,-1418 2216,-1418 FU2.2 2209,-1424 2159,-1424 2121.04,-1386.04 2121.04,-1336.04 2079,-1294
  Bottom Layer w30: DC3.1 1080,-512 1108,-484 v3(1709,-484) ; v3@1821,-1318 v3(1821,-869)
pads on no net: P1.18 P1.23 P1.24 U2.6 U5.16 U5.17 U5.19 U5.20 U5.22 U5.23 U5.25 U5.35 U5.41 U5.47 U5.50 U5.51 U5.52 U5.53 U5.54 U5.55 U5.56 USB-A1.7 USB-A2.2 USB-A2.3 USB-A2.7

## Polygon pours and split planes (outlines as drawn)
GND on Top Layer "Top Layer-No Net" (solid, remove dead copper, pour order 1000): -171.95,69.22 2765.05,69.22 2820.05,124.22 2781.05,85.22 2781.05,-1874.78 2781.05,-1912.78 2743.05,-1950.78 -122.95,-1950.78 -122.95,-1710.78 -160.95,-1672.78 -54.95,-1566.78 -54.95,69.22
GND on Bottom Layer "Top Layer-No Net" (solid, remove dead copper, pour order 1001): -229.24,184.24 -185.24,140.24 2999.76,140.24 2999.76,-1805.76 2916.76,-1888.76 2770.76,-2034.76 2018.76,-2034.76 -160.24,-2034.76 -448.24,-1746.76 -87.24,-1385.76 -87.24,150.24

## Keep-outs
Keep-Out Layer:
  circle w10: c2549.21,-1761.81 r59.06
  circle w10: c2549.21,-88.58 r59.06
  circle w10: c88.58,-1761.81 r59.06
  circle w10: c88.58,-88.58 r59.06
  lines w5: 8,-1841 2628,-1841 2628,-8 8,-8 8,-1841

## Other copper
Top Layer:
  rectangle net GND: 487.2,-1754.8 560.04,-1557.95
  rectangle net GND: 492,-1666 560,-1626
  region net VCC_IN: 1250,-1427 1331,-1427 1381,-1477 1587,-1477 1596,-1486 1596,-1532 1589,-1539 1375,-1539 1355,-1559 1239.81,-1559 1236.81,-1556 1236.81,-1440.19
  region net VCC: 579,-1668 682,-1668 724,-1626 724,-1555 758,-1521 758,-1456 767,-1447 798,-1447 801,-1450 801,-1515 820,-1534 1004,-1534 1013,-1525 1013,-1384 1025,-1372 1084,-1372 1090,-1378 1090,-1621 1151,-1682 1151,-1758 1136,-1773 1106,-1773 1083,-1750 1083,-1683 1039,-1639 756,-1639 701,-1694 581,-1694 574,-1687 574,-1673
  region net NetC29_2: 584,-1647 665,-1647 709,-1603 709,-1492 679,-1462 679,-1171 676,-1168 602,-1168 597,-1173 597,-1459 676,-1538 676,-1599 659,-1616 582,-1616 575,-1623 575,-1638
  region net VCC_5V: 41.94,-1322 359,-1322 414,-1267 414,-1198 423,-1189 478,-1189 482,-1193 482,-1490 40.94,-1490 40.94,-1323
Bottom Layer:
  rectangle net VCC_5V: 40.94,-1490 190.94,-1376

## Silkscreen, mask and mechanical layers (free items; w line width, h text height)
Top Overlay:
  text "GND" at 2187,-1589 h50 r270
  text "TXD" at 2080,-1590 h50 r270
  text "RXD" at 1894.53,-1707.54 h50 r270
Bottom Overlay:
  text "GND" at 1176,-456 h50 r90
  text "5V" at 1097.68,-459.05 h50 r90
  text "GND" at 1257,-463 h50 r90
  text "12V" at 1345,-470 h50 r90
  text "GND" at 2546,-916 h50
  text "5V" at 2221,-917 h50
  text "DP" at 2410,-917 h50
  text "DM" at 2326.39,-918.06 h50
  text "12V" at 1152,-1597 h50
  text "GND" at 1276,-1603 h50
  text "5V" at 2398,-1611 h50
  text "GND" at 2531,-1615 h50
Mechanical 1:
  circle w10: c88.58,-88.58 r59.06
  circle w10: c88.58,-1761.81 r59.06
  circle w10: c2549.21,-88.58 r59.06
  circle w10: c2549.21,-1761.81 r59.06
  lines w5: 0,-1850.39 0,0 2637.8,0 2637.8,-1850.39 0,-1850.39